# EAGLE board BadUSB (EAGLE 9.3.0)
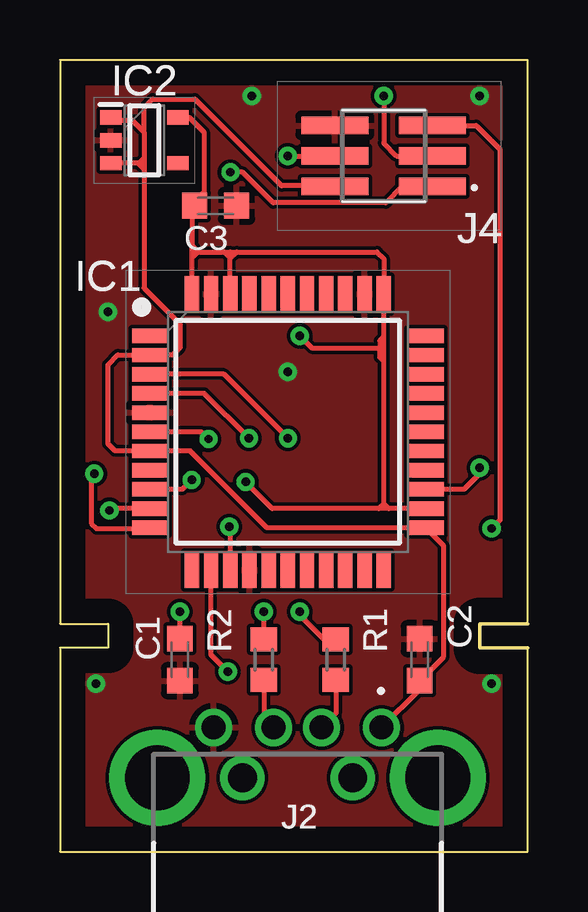
[diagram p0: board, top side]
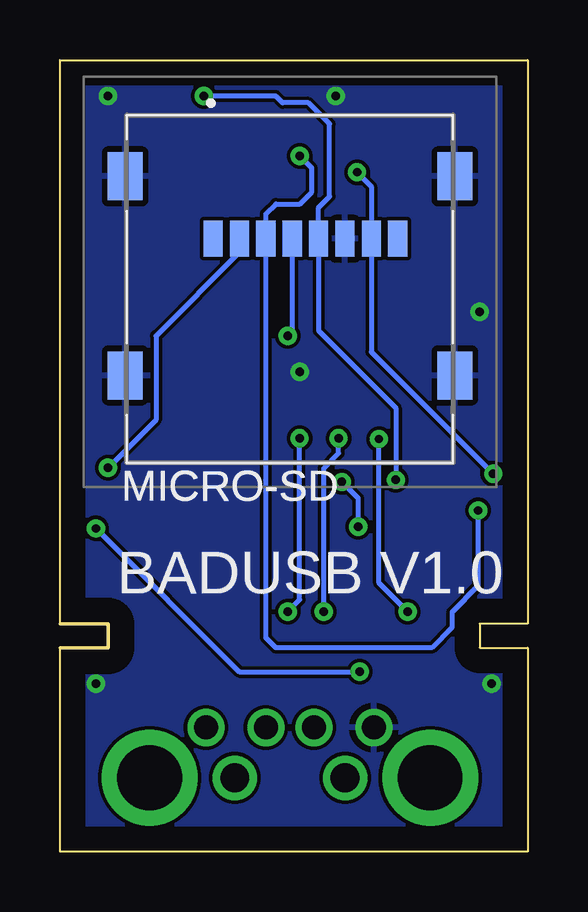
[diagram p1: board, bottom side, seen from below]

Size 19.5 x 33 mm. Coordinates in mm from the lower left corner, seen from the top.
Outline: 19.5,9.5 17.5,9.5 17.5,8.5 19.5,8.5 19.5,0 0,0 0,8.5 2,8.5 2,9.5 0,9.5 0,33 19.5,33 19.5,9.5
Copper layers (1*16): Top 0.035mm / dielectric 1.5mm / Bottom 0.035mm
Design rules "default": minimum track width 6mil, minimum drill 0.35mm, track to track 6mil, track to pad 6mil, pad to pad 6mil, via to via 6mil, smd to smd 6mil, copper to edge 40mil, drill to drill 6mil, minimum pad ring 10mil, minimum via ring 8mil, stop-mask expansion 4mil, vias tented up to drill 0mil, thermal gap 10mil

## Footprints (pad centres in the part's own frame; a part is rotated, then mirrored left to right if it is on the bottom)
C0603K = smd 1.05 x 1.08: 1 -0.875,0; 2 0.875,0
QFP80P1200X1200X120-44N = smd 1.5 x 0.6: 1 -5.75,4; 2 -5.75,3.2; 3 -5.75,2.4; 4 -5.75,1.6; 5 -5.75,0.8; 6 -5.75,0; 7 -5.75,-0.8; 8 -5.75,-1.6; 9 -5.75,-2.4; 10 -5.75,-3.2; 11 -5.75,-4; 23 5.75,-4; 24 5.75,-3.2; 25 5.75,-2.4; 26 5.75,-1.6; 27 5.75,-0.8; 28 5.75,0; 29 5.75,0.8; 30 5.75,1.6; 31 5.75,2.4; 32 5.75,3.2; 33 5.75,4 | smd 0.6 x 1.5: 12 -4,-5.75; 13 -3.2,-5.75; 14 -2.4,-5.75; 15 -1.6,-5.75; 16 -0.8,-5.75; 17 0,-5.75; 18 0.8,-5.75; 19 1.6,-5.75; 20 2.4,-5.75; 21 3.2,-5.75; 22 4,-5.75; 34 4,5.75; 35 3.2,5.75; 36 2.4,5.75; 37 1.6,5.75; 38 0.8,5.75; 39 0,5.75; 40 -0.8,5.75; 41 -1.6,5.75; 42 -2.4,5.75; 43 -3.2,5.75; 44 -4,5.75
SOT95P280X130-5N = smd 0.9 x 0.6: 1 -1.4,0.95; 2 -1.4,0; 3 -1.4,-0.95; 4 1.4,-0.95; 5 1.4,0.95
UP2-AH-1-TH = drill 1 pad 1.55: 1 3.5,19.9; 2 1,19.9; 3 -1,19.9; 4 -3.5,19.9 | drill 1.2 pad 1.85: 5 -2.3,17.8; 6 2.3,17.8 | drill 2.7 pad 4: 7 5.85,17.8; 8 -5.85,17.8
FTS-103-YY-XX-DV-TR = smd 0.74 x 2.79: 1 -1.27,-2.035; 2 -1.27,2.035; 3 0,-2.035; 4 0,2.035; 5 1.27,-2.035; 6 1.27,2.035
472192001 = smd 0.8 x 1.5: 1 3.205,-1.8; 2 2.105,-1.8; 3 1.005,-1.8; 4 -0.095,-1.8; 5 -1.195,-1.8; 6 -2.295,-1.8; 7 -3.395,-1.8; 8 -4.495,-1.8 | smd 1.45 x 2: 9 -6.875,-4.4; 10 -6.875,3.9; 11 6.875,3.9; 12 6.875,-4.4
R0603 = smd 1 x 1.1: 1 -0.85,0; 2 0.85,0

## Placement (x,y rotation side)
C1  1uF  [C0603K]  5,8 270 top
C2  10uF  [C0603K]  15,8 90 top
C3  10uF  [C0603K]  6.49,26.92 0 top
IC1  ATMEGA32U4-AUR  [QFP80P1200X1200X120-44N]  9.5,17.5 0 top
IC2  XC6219A332MR-G  [SOT95P280X130-5N]  3.52,29.65 0 top
J2  UP2-AH-1-TH  [UP2-AH-1-TH]  9.91,-14.73 0 top
J4  FTS-103-01-L-DV-TR  [FTS-103-YY-XX-DV-TR]  13.5,29 90 top
MICRO-SD  47219-2001  [472192001]  9.91,23.75 180 bottom
R1  22R  [R0603]  11.5,8 270 top
R2  22R  [R0603]  8.5,8 90 top

## Library data of the parts
C1-C3 = rcl; SPICEPREFIX: C
IC1 = ATMEGA32U4-AUR; ARROW_PART_NUMBER: ATMEGA32U4-AUR; ARROW_PRICE-STOCK: https://www.arrow.com/en/products/atmega32u4-aur/microchip-technology; DESCRIPTION: 8-bit Microcontrollers - MCU USB 32K Flash 16 MHz; HEIGHT: 1.2mm; MANUFACTURER_NAME: Microchip; MANUFACTURER_PART_NUMBER: ATMEGA32U4-AUR; MOUSER_PART_NUMBER: 556-ATMEGA32U4-AUR; MOUSER_PRICE-STOCK: https://www.mouser.co.uk/ProductDetail/Microchip-Technology-Atmel/ATMEGA32U4-AUR?qs=rBGENRD8NwIbVIAimLns%252BA%3D%3D
IC2 = XC6219A332MR-G; DESCRIPTION: LDO Voltage Regulators 300mA High Speed Votage Regulator; HEIGHT: 1.3mm; MANUFACTURER_NAME: Torex; MANUFACTURER_PART_NUMBER: XC6219A332MR-G; MOUSER_PART_NUMBER: 865-XC6219A332MR-G; MOUSER_PRICE-STOCK: https://www.mouser.co.uk/ProductDetail/Torex-Semiconductor/XC6219A332MR-G?qs=AsjdqWjXhJ%2FqZhqmpYowVg%3D%3D
J2 = UP2-AH-1-TH; ARROW_PART_NUMBER: UP2-AH-1-TH; ARROW_PRICE-STOCK: https://www.arrow.com/en/products/up2-ah-1-th/cui-devices; DESCRIPTION: USB Connectors USB 2.0 type A plug 4 pin Horizontal TH; HEIGHT: mm; MANUFACTURER_NAME: CUI Devices; MANUFACTURER_PART_NUMBER: UP2-AH-1-TH; MOUSER_PART_NUMBER: 490-UP2-AH-1-TH; MOUSER_PRICE-STOCK: https://www.mouser.co.uk/ProductDetail/CUI-Devices/UP2-AH-1-TH?qs=5mqXD9RfOg0slNuu3mCk4w%3D%3D
J4 = FTS-103-01-L-DV-TR; ARROW_PART_NUMBER: FTS-103-01-L-DV-TR; ARROW_PRICE-STOCK: https://www.arrow.com/en/products/fts-103-01-l-dv-tr/samtec; DESCRIPTION: 6 Position, Micro Low Profile Header Strip, Double-Row, Vertical Surface Mount; HEIGHT: mm; MANUFACTURER_NAME: SAMTEC; MANUFACTURER_PART_NUMBER: FTS-103-01-L-DV-TR; MOUSER_PART_NUMBER: 200-FTS10301LDVTR; MOUSER_PRICE-STOCK: https://www.mouser.co.uk/ProductDetail/Samtec/FTS-103-01-L-DV-TR?qs=0lQeLiL1qyZdQ0modVbSfg%3D%3D
MICRO-SD = 47219-2001; DESCRIPTION: Molex 47219 Series 8 Way Horizontal Hinged Micro SD Memory Card Connector with Solder Termination; HEIGHT: mm; MANUFACTURER_NAME: Molex; MANUFACTURER_PART_NUMBER: 47219-2001; MOUSER_PART_NUMBER: 538-47219-2001; MOUSER_PRICE-STOCK: https://www.mouser.co.uk/ProductDetail/Molex/47219-2001?qs=6kT3pPPHxnVaoXw6Dd7beQ%3D%3D
R1 R2 = rcl; SPICEPREFIX: R

## Nets
+3V3: C3.1 IC1.14 IC1.24 IC1.34 IC1.42 IC1.44 IC2.5 MICRO-SD.4
+5V: C2.1 IC1.2 IC1.7 IC1.23 IC2.1 IC2.3 J2.1 J4.2
CS: IC1.25 MICRO-SD.2
D+: IC1.4 R2.2
D-: IC1.3 R1.1
GND: C1.2 C2.2 C3.2 IC1.5 IC1.15 IC1.35 IC1.43 IC2.2 J2.4 J4.6 MICRO-SD.6 MICRO-SD.9 MICRO-SD.10 MICRO-SD.11 MICRO-SD.12
MISO: IC1.11 J4.1 MICRO-SD.7
MOSI: IC1.10 J4.4 MICRO-SD.3
N$2: J2.2 R1.2
N$3: J2.3 R2.1
N$5: C1.1 IC1.6
RESET: IC1.13 J4.5
SCK: IC1.9 J4.3 MICRO-SD.5

## Tracks (layer width: path | path; a pad name or v marks a point on that pad's centre or on a via)
+3V3  (via drill 0.35)
  Top 0.2: IC1.44 5.5,24.77 | 5.5,24.77 5.5,25 | 5.5,25 5.5,25.27 | IC2.5 5.4,30.6 6,30 6,27.5 5.62,27.11 C3.1 5.5,26.8 5.5,25.27 | 5.74,25 5.5,25 | 5.77,25 5.74,25 | 5.74,25 5.5,24.77 | 5.77,25 5.5,25.27 | 5.77,25 6.86,25 | 6.86,25 7.11,25 | 7.11,25 7.37,25 | 7.37,25 13.23,25 13.5,24.73 IC1.34 13.5,21.46 | IC1.42 7.1,24.73 | 7.1,24.76 7.1,24.99 7.11,25 | 7.1,24.73 7.37,25 | 7.1,24.73 7.1,24.76 | 7.1,24.76 6.86,25 | 13.5,14.5 13.7,14.3 IC1.24 13.3,14.3 | 13.5,14.5 13.5,20.45 | 13.5,20.45 13.5,21 | 13.5,21 13.5,21.46 | 13.3,14.3 8.85,14.3 v7.74,15.41 | v7.07,13.54 7.1,13.51 IC1.14 | 13.5,14.5 13.3,14.3 | v10,21.5 10.5,21 13.34,21 | 13.34,21 13.5,21 | 13.5,21.46 13.34,21.3 13.34,21 | 13.5,20.45 13.34,20.61 13.34,21
  Bottom 0.2: v7.74,15.41 7.07,14.73 v7.07,13.54 | MICRO-SD.4 9.81,21.68 v10,21.5
+5V
  Top 0.2: J2.1 15,6.76 C2.1 16,8.12 16,12.75 IC1.23 8.63,13.5 5.43,16.7 IC1.7 2.3,16.7 2,17 2,20.29 2.41,20.7 IC1.2 4.7,20.7 5,21 5,22 3.5,23.5 3.5,28.45 | IC2.1 2.22,30.5 3,30.5 3.5,30 | IC2.3 3.25,28.7 3.27,28.67 | 3.5,30 3.5,28.9 | 3.5,28.9 3.5,28.45 | 3.27,28.67 3.5,28.45 | 3.27,28.67 3.5,28.9 | 3.5,30 3.5,31 3.87,31.37 5.63,31.37 9.25,27.75 11.44,27.75 J4.2
CS  (via drill 0.35)
  Top 0.2: v17.5,16 17.5,15.75 16.85,15.1 IC1.25
  Bottom 0.2: MICRO-SD.2 12.02,24.98 15.5,21.5 15.5,18 v17.5,16
D+  (via drill 0.35)
  Top 0.2: R2.2 v8.5,10 | v7.88,17.23 6.01,19.1 IC1.4
  Bottom 0.2: v8.5,10 8.5,15.98 7.88,16.59 v7.88,17.23
D-  (via drill 0.35)
  Top 0.2: R1.1 11,8.85 10,9.85 v10,10 | v9.51,17.23 6.84,19.9 IC1.3
  Bottom 0.2: v10,10 9.51,10.49 v9.51,17.23
GND  (via drill 0.35)
  other vias: 1.5,7 18,7 17.5,31.5 8,31.5 2,22.5 9.5,20
  pour Top: 0,33 19.5,33 19.5,0 0,0
  pour Bottom: 0,33 19.5,33 19.5,0 0,0
MISO  (via drill 0.35)
  Top 0.2: v1.43,15.75 1.3,15.62 1.3,13.68 1.52,13.46 3.71,13.46 IC1.11 | J4.1 14.27,27.73 13.59,27.05 8.89,27.05 7.62,28.32 v7.11,28.32
  Bottom 0.2: v1.43,15.75 6.51,20.83 MICRO-SD.7 6.51,27.72 v7.11,28.32
MOSI  (via drill 0.35)
  Top 0.2: IC1.10 2.14,14.3 v2.06,14.22 | v9.5,29 J4.4
  Bottom 0.2: v2.06,14.22 2.06,11.07 3.15,9.98 3.15,9.35 4,8.5 10.5,8.5 10.91,8.91 MICRO-SD.3 10.91,26.59 10.5,27 9.5,27 9,27.5 9,28.5 v9.5,29
N$2
  Top 0.2: R1.2 11.5,5.76 J2.2
N$3
  Top 0.2: R2.1 8.5,5.58 J2.3
N$5  (via drill 0.35)
  Top 0.2: C1.1 v5,10 | v6.2,17.2 5.89,17.5 IC1.6
  Bottom 0.2: v5,10 6.2,11.2 v6.2,17.2
RESET  (via drill 0.35)
  Top 0.2: J4.5 17.36,30.27 18.35,29.28 18.35,13.82 v18,13.47 | v7,7.5 6.3,8.2 IC1.13
  Bottom 0.2: v7,7.5 12.03,7.5 v18,13.47
SCK  (via drill 0.35)
  Top 0.2: v5.5,15.49 5.1,15.1 IC1.9 | v13.5,31.5 13.5,29.54 14.04,29 J4.3
  Bottom 0.2: v5.5,15.49 5.5,18.5 8.71,21.71 MICRO-SD.5 8.71,26.84 8.26,27.3 8.26,30.34 9.14,31.22 10.22,31.22 10.5,31.5 v13.5,31.5

## Text on the board
bPlace: BADUSB V1.0
_tNames: IC2 | IC2 | IC2 | J4 | J4 | J4 | C3 | C3 | C3 | IC1 | IC1 | IC1 | C1 | C1 | C1 | R2 | R2 | R2 | R1 | R1 | R1 | C2 | C2 | C2 | J2 | J2 | J2
_bNames: MICRO-SD | MICRO-SD | MICRO-SD